# Altium PCB JammerCircuit_PCB.PcbDoc
Units mm, origin at the board's own origin, x right, y up, seen from the top; angles counter-clockwise.
Board outline 55 x 50 mm, 2 copper layers (Top Layer, Bottom Layer), stack 1.57 mm thick; 20 components, 12 nets, 52 pads, 0 vias.
Unrouted connection lines stored in the file: 11.
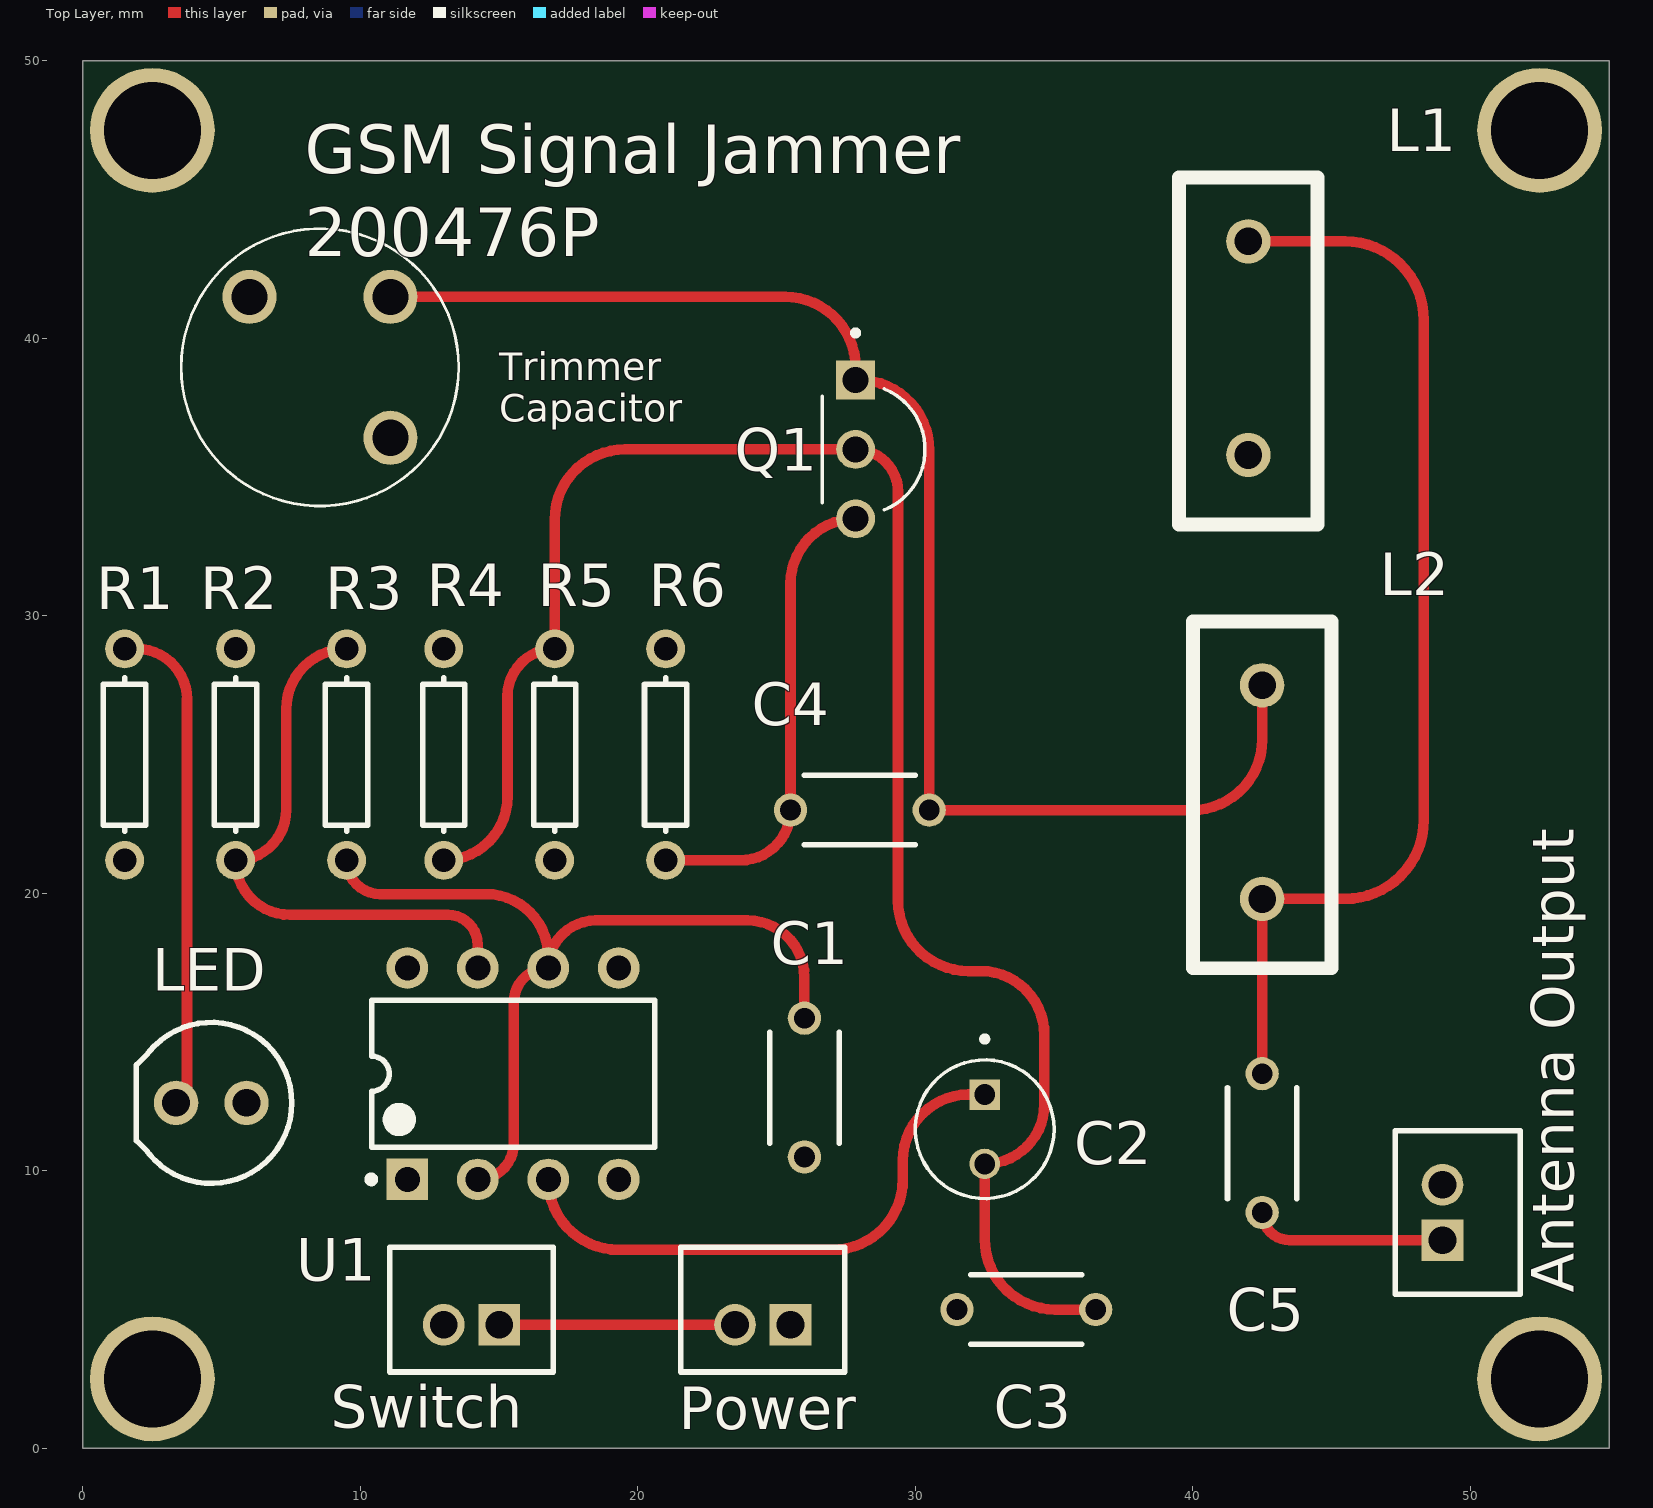
[diagram p0: Top Layer view]
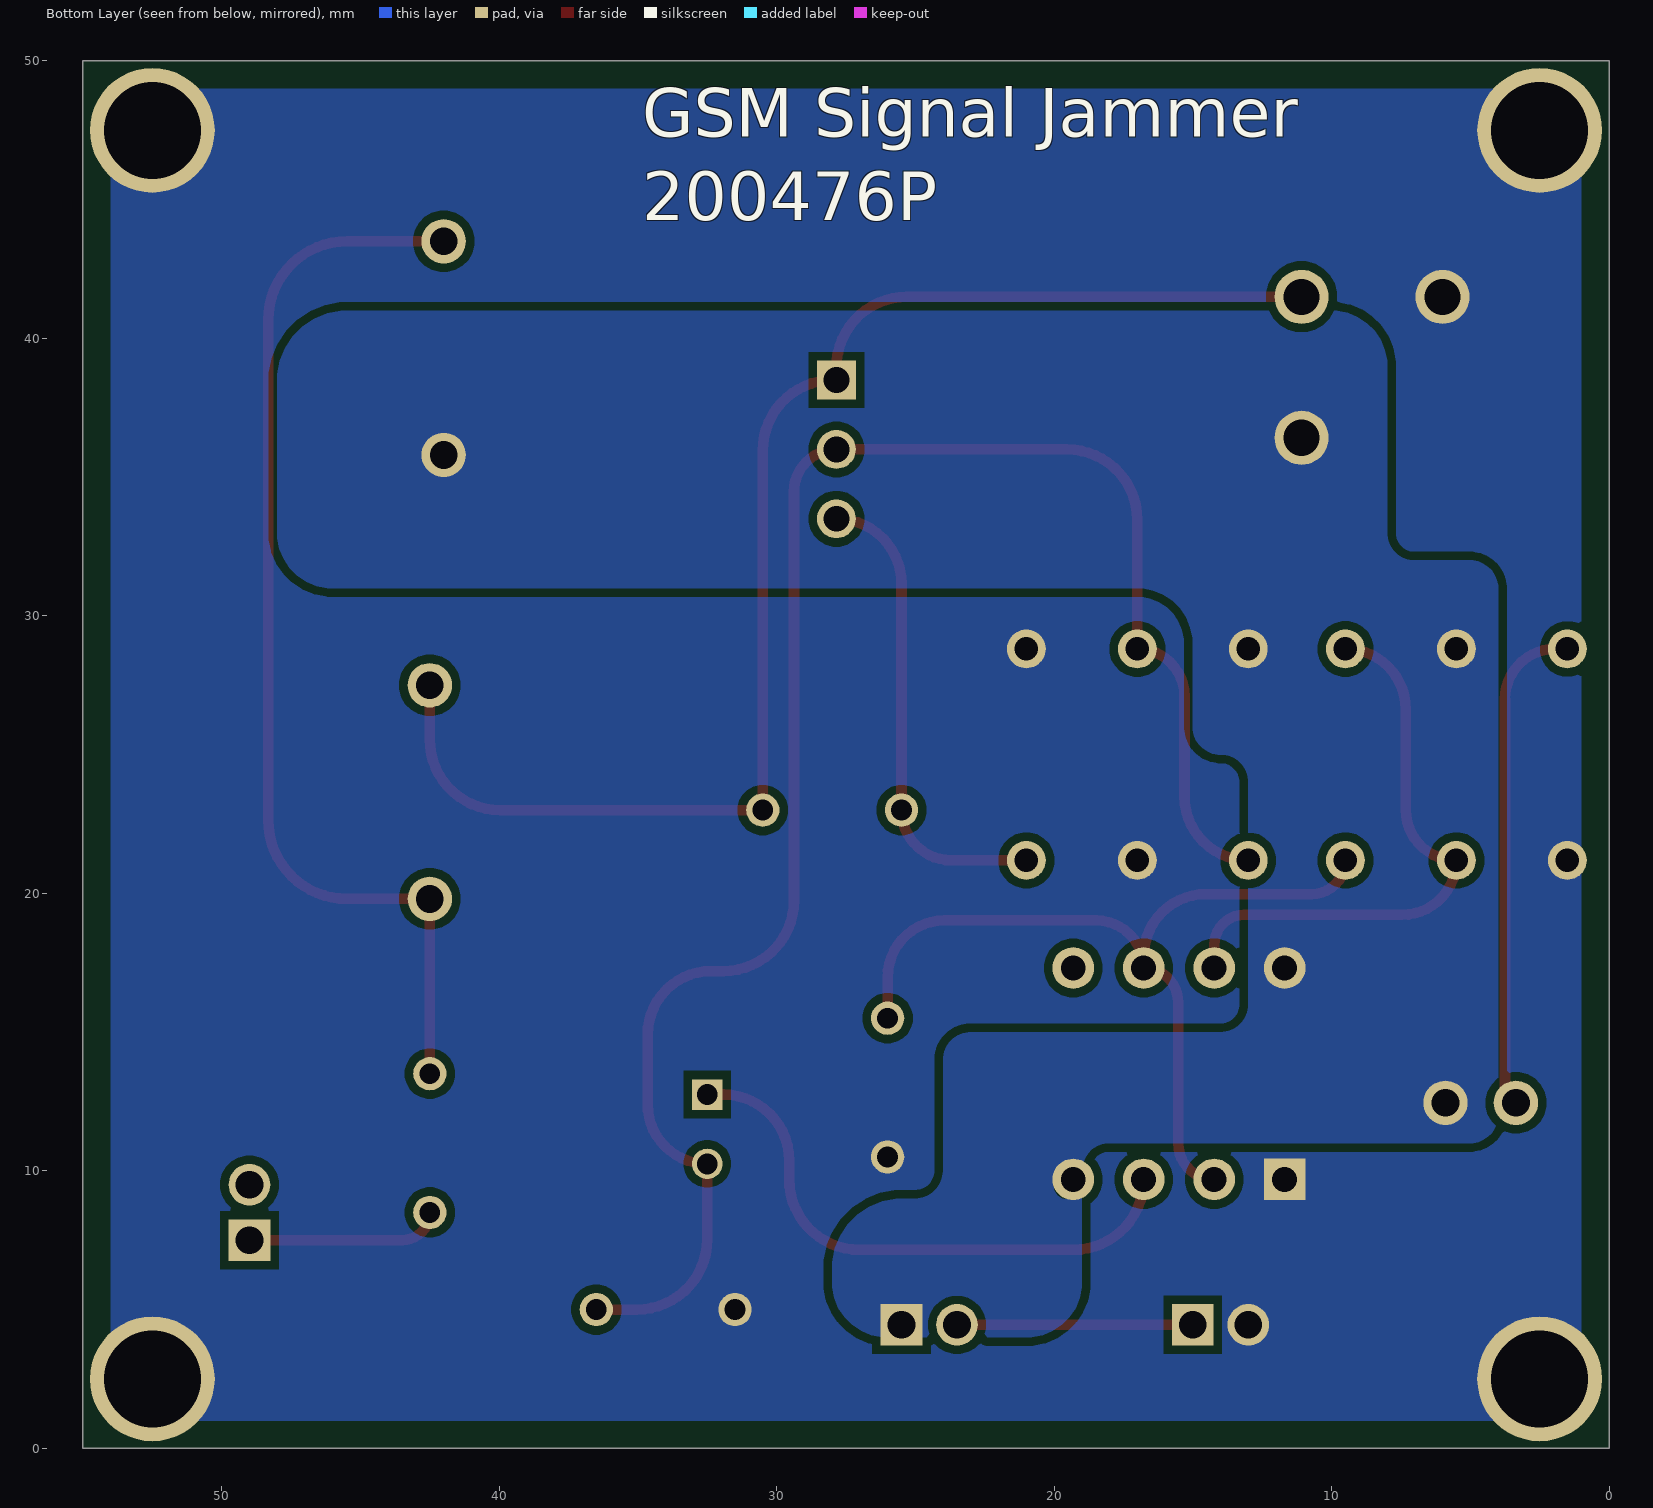
[diagram p1: Bottom Layer view, seen from below]

## Layer stack, top to bottom
Top Solder: solder mask 0.0127, Solder Resist, Dk 3.8
Top Layer: signal copper 0.035
Dielectric: core 1.5, FR-4, Dk 4.5
Bottom Layer: signal copper 0.035
Bottom Solder: solder mask 0.0127, Solder Resist, Dk 3.8

## Board outline
0,0 55,0 55,50 0,50

## Design rules (kind name [scope] priority, off if disabled: settings)
BoardOutlineClearance [All] p1: gap=0.2 ignorepadtopadclearanceinfootprint=FALSE
Clearance [All] p1: gap=0.3 ignorepadtopadclearanceinfootprint=FALSE
ComponentClearance [All] p1: gap=0.127 collisioncheckmode=3 verticalgap=0.127 showdistances=TRUE
DiffPairsRouting [All] p1: maxlimit=0.254 minlimit=0.127 mostfreqgap=0.127 toplayer_minwidth=0.127 toplayer_maxwidth=25.4 toplayer_prefwidth=0.127 bottomlayer_minwidth=0.127 bottomlayer_maxwidth=25.4 bottomlayer_prefwidth=0.127 maxuncoupledlength=12.7
Height [All] p1: minheight=0 maxheight=1816.048 prefheight=12.7
HoleSize [All] p1: absolutevalues=TRUE maxlimit=6.3 minlimit=0.3 maxpercent=80.000 minpercent=20.000
HoleToHoleClearance [All] p1: gap=0.25 allowstackedmicrovias=FALSE
MinimumAnnularRing [All] p1: minimumring=0.076
MinimumSolderMaskSliver [All] p1: minsoldermaskwidth=0
PlaneClearance [All] p1: clearance=0.5
PlaneConnect PlaneConnectPowerPads [InPadClass('PowerPads')] p1: planeconnectstyle=Direct reliefexpansion=0.508 reliefentries=4 reliefconductorwidth=0.254 reliefairgap=0.254
PlaneConnect [All] p2: planeconnectstyle=Direct reliefexpansion=0.3 reliefentries=4 reliefconductorwidth=0.127 reliefairgap=0.127
PolygonConnect PolygonConnectPowerPads [All vs (InPadClass('PowerPads'))] p1: connectstyle=Direct reliefconductorwidth=0.254 reliefentries=4 polygonreliefangle="90 Angle" airgapwidth=0.254
PolygonConnect [All] p2: connectstyle=Direct reliefconductorwidth=0.127 reliefentries=4 polygonreliefangle="90 Angle" airgapwidth=0.127
RoutingCorners [All] p1: cornerstyle=Round minsetback=2.54 maxsetback=2.54
RoutingVias [All] p1: holewidth=0.3 width=0.6 viastyle="Through Hole" minholewidth=0.3 minwidth=0.6 maxholewidth=0.6 maxwidth=6.6
SilkToSilkClearance [All] p1: silktosilkclearance=0
SilkToSolderMaskClearance [IsPad] p1: minsilkscreentomaskgap=0.127 clearancetoexposedcopper=TRUE
SolderMaskExpansion [All] p1: expansion=0.075 istentingtop=FALSE
Width [All] p1: maxlimit=25.4 minlimit=0.127 preferedwidth=0.35 minimp=50.000000 maximp=50.000000 favimp=50.000000
19 further rules are at their usual default settings.

## Classes and differential pairs
component class Sheet1: "Antenna Output" C1 C3 C4 C5 L1 L2 LED Power Q1 R1 R2 R3 R4 R5 R6 Switch U1

## Components (designator, comment, footprint, x,y, rotation, side; value= is the part's Value field where it differs from the comment)
"Antenna Output" "B2B-PH-K-S(LF)(SN)" JST-B2B-PH-K-S_V 49.55,8.5 r90 top
C1 "1pF" RDE5C1H330J0M1H03A 26,10.5 r90 top
C2 "4.7uF" CAPPRD250W50D500H1100 32.5,11.5 r270 top
C3 "50pF" RDE5C1H330J0M1H03A 31.5,5 r0 top
C4 "1pF" RDE5C1H330J0M1H03A 25.5,23 r0 top
C5 "5pF" RDE5C1H330J0M1H03A 42.5,13.5 r270 top
L1 "2.2" "Inductor Coil TH" 42,35.8 r90 top
L2 "1" "Inductor Coil TH" 42.5,19.8 r90 top
LED "151051BS04000" "Type 5mm" 4.625,12.45 r180 top
Power "B2B-PH-K-S(LF)(SN)" JST-B2B-PH-K-S_V 24.5,5 r180 top
Q1 "BC547B" TO92250P510H770-3 28.5,36 r270 top
R1 "Res1" AXIAL-0.3 1.5,25 r90 top value=220
R2 "Res2" AXIAL-0.3 5.5,25 r90 top value=6.8K
R3 "Res3" AXIAL-0.3 9.5,25 r270 top value=82K
R4 "Res4" AXIAL-0.3 13,25 r90 top value=10K
R5 "Res5" AXIAL-0.3 17,25 r90 top value=6K
R6 "Res6" AXIAL-0.3 21,25 r270 top value=220
Switch "B2B-PH-K-S(LF)(SN)" JST-B2B-PH-K-S_V 14,5 r180 top
"Trimmer Capacitor" "BFC280811339" BFC280811339 11.08,36.42 r180 top
U1 "NE555P" P0008A 15.5,13.5 r90 top

## Footprints (in the part's own frame and the unit in brackets; to place one, negate y for a bottom-side part, rotate by r counter-clockwise, add the part's x,y. Pads: shape width x height; smd on the part's side, far side on the other; paste and mask are expansions set on the pad)
AXIAL-0.3 [mm] "Axial Device, Thru-Hole; 2 Leads; 0.3 in Pin Spacing"
  round 1.4 hole 0.85: 1(-3.81,0) 2(3.81,0)
  silkscreen extent -2.77,-0.76 2.77,0.76
BFC280811339 [mm]
  round 1.95 hole 1.3: 1(0,0) 2(0,-5.08) 3(5.08,-5.08)
  silkscreen extent -2.46,-7.54 7.54,2.46, body extent -10,-3.38 10,3.38, height 5.8
CAPPRD250W50D500H1100 [mm]
  round 1.1 hole 0.75: N(1.25,0)
  rect 1.1x1.1 hole 0.75: P(-1.25,0)
  silkscreen extent -3.35,-2.5 2.5,2.5, body extent -2.5,-2.5 2.5,2.5, height 11
"Inductor Coil TH" [mm]
  round 1.6 hole 1: 0(7.7,0) 1(0,0)
  silkscreen extent -2.5,-2.5 10,2.5, body extent -2.26,-8.91 9.81,8.87, height 17.79
JST-B2B-PH-K-S_V [mm] "Connector, 2-Leads, Body 5.9x4.5mm, Pitch 2mm"
  rect 1.5x1.5 hole 1: 1(-1,0.55)
  round 1.5 hole 1: 2(1,0.55)
  silkscreen extent -2.95,-2.25 2.95,2.25, body extent -2.95,-2.25 2.95,2.25, height 6
P0008A [mm] "DIP, 8-Leads, Body 10.15x6.6mm, Pitch 2.54mm"
  rect 1.5x1.5 hole 0.9: 1(-3.81,3.81)
  round 1.5 hole 0.9: 2(-3.81,1.27) 3(-3.81,-1.27) 4(-3.81,-3.81) 5(3.81,-3.81) 6(3.81,-1.27) 7(3.81,1.27) 8(3.81,3.81)
  silkscreen extent -3.93,-5.1 2.65,5.23, body extent -3.95,-5.07 3.95,5.07, height 5.08
RDE5C1H330J0M1H03A [mm]
  round 1.2 hole 0.75: 1(0,0) 2(5,0)
  silkscreen extent 0.5,-1.25 4.5,1.25, body extent -0.29,-1.25 5.21,1.25, height 6
TO92250P510H770-3 [mm]
  rect 1.4x1.4 / inner round 1.4 / far side rect 1.4x1.4 hole 0.93: 1(-2.5,-0.655)
  round 1.4 hole 0.93: 2(0,-0.655) 3(2.5,-0.655)
  silkscreen extent -4.3,-1.85 2.18,1.85, body extent -2.38,-1.43 2.38,2.19, height 5.33
"Type 5mm" [mm] "THT, LED-5mm, 2pin- Body 5.8mm"
  round 1.6 hole 1: 1(1.27,0) 2(-1.27,0)
  silkscreen extent -2.9,-2.9 2.7,2.9, body extent -2.9,-2.9 2.5,2.9, height 11.7

## Part data
"Antenna Output" Power Switch: library part CMP-2000-05162-1, "Male Header, Pitch 2 mm, 1 x 2 Position, Height 6 mm, Tail Length 3.4 mm, -25 to 85 degC, RoHS, Bulk", Manufacturer=JST, Datasheet URL=http://datasheet.octopart.com/B2B-PH-K-S%28LF%29%28SN%29-JST-datasheet-8324864.pdf, Datasheet Version=Nov-08, Manufacturer URL=http://www.jst.com/home2.html, No of Positions=2, Pitch=2mm, Style/Orientation=StraightHeader/Plug, Termination=Crimp, Type=ShroudedHeader
C1 C3 C4: library part RDE5C1H1R0C0M1H03A, "Capacitor L=4.0mm W=3.5mm T=2.5mm", Manufacturer_Name="Murata Electronics", Mouser Part Number=81-RDE5C1H1R0C0M1H3A, Datasheet Link=https://componentsearchengine.com/Datasheets/1/RDE5C1H1R0C0M1H03A.pdf, Geometry.Height=5mm, Manufacturer_Part_Number=RDE5C1H1R0C0M1H03A, Mouser Price/Stock=https://www.mouser.com/Search/Refine.aspx?Keyword=81-RDE5C1H1R0C0M1H3A
C2: library part EEUEB1J100SH, "10ÂµF 63V Aluminum Electrolytic Capacitors Radial, Can 5000 Hrs @ 105Â°C", Package="RADIAL-2 Panasonic", Availability="In Stock", Check_prices=https://www.snapeda.com/parts/EEUEB1J100SH/Panasonic/view-part/5796687/?ref=eda, MF=Panasonic, MP=EEUEB1J100SH, Price=None, SnapEDA_Link=https://www.snapeda.com/parts/EEUEB1J100SH/Panasonic/view-part/5796687/?ref=snap
C5: library part RDE5C1H5R0C0K1H03B, "Capacitor L=4.0mm W=3.5mm T=2.5mm", Manufacturer_Name="Murata Electronics", Mouser Part Number=81-RDE5C1H5R0C0K1H3B, Datasheet Link=https://componentsearchengine.com/Datasheets/1/RDE5C1H5R0C0K1H03B.pdf, Geometry.Height=5mm, Manufacturer_Part_Number=RDE5C1H5R0C0K1H03B, Mouser Price/Stock=https://www.mouser.com/Search/Refine.aspx?Keyword=81-RDE5C1H5R0C0K1H3B
L1 L2: library part Inductor
LED: library part CMP-1488-00009-1, "THT LED round mono-color color lens, WL-TMRW, Blue", Emitting color=Blue, Manufacturer="Wuerth Elektronik", ComponentLink1Description="Manufacturer URL", ComponentLink1URL=http://www.we-online.com, ComponentLink2Description=Datasheet, ComponentLink2URL=http://katalog.we-online.de/pbs/datasheet/7448042001.pdfhttp://katalog.we-online.de/pbs/datasheet/7448042001.pdfhttp://katalog.we-online.de/pbs/datasheet/7448042001.pdfhttp://katalog.we-online.de/pbs/datasheet/151051BS04000.pdf, PackageReference="Type 5mm", PartNumber=151051BS04000
Q1: "Bipolar (BJT) TransistÃ¶r NPN 45 V 100 mA 300MHz 625 mW Delikten TO-92 (TO-226)", Package="TO-92-3 ON Semiconductor", Availability="In Stock", Check_prices=https://www.snapeda.com/parts/BC547B/Onsemi/view-part/?ref=eda, MF="ON Semiconductor", MP=BC547B, Price=None, Purchase-URL=https://pricing.snapeda.com/search/part/BC547B/?ref=eda, SnapEDA_Link=https://www.snapeda.com/parts/BC547B/Onsemi/view-part/?ref=snap
R1: "Resistor", LatestRevisionDate=17-Jul-2002, LatestRevisionNote="Re-released for DXP Platform.", PackageDescription="Axial Device, Thru-Hole; 2 Leads; 0.3 in Pin Spacing", PackageReference=AXIAL-0.3, Published=8-Jun-2000, Publisher="Altium Limited"
R2 R3 R4 R5 R6: library part Res1, "Resistor", LatestRevisionDate=17-Jul-2002, LatestRevisionNote="Re-released for DXP Platform.", PackageDescription="Axial Device, Thru-Hole; 2 Leads; 0.3 in Pin Spacing", PackageReference=AXIAL-0.3, Published=8-Jun-2000, Publisher="Altium Limited"
"Trimmer Capacitor": "CAP TRIMMER 3-33PF 250V TH", Manufacturer_Name=Vishay, Arrow Part Number=BFC280811339, Arrow Price/Stock=https://www.arrow.com/en/products/bfc280811339/vishay, Datasheet Link=https://www.arrow.com/en/products/bfc280811339/vishay, Geometry.Height=10mm, Manufacturer_Part_Number=BFC280811339
U1: library part CMP-2000-04954-1, "Precision Timer, 4.5 to 16 V, 0 to 70 degC, 8-Pin DIP, Pb-Free, Tube", Manufacturer=TexasInstruments, Maximum High Level Output Current=-200mA, Maximum Low Level Output Current=200mA, Operating Supply Voltage=5, Package=8PDIP, Package Description="8-Pin Double In-line Package, Body 9.59 x 6.35 mm, Pitch 2.54 mm", Package Reference=P8, Category=Timer, Datasheet URL=http://www.ti.com/general/docs/lit/getliterature.tsp?genericPartNumber=NE555&fileType=pdf, Datasheet Version="Rev. I, 09/2014", Manufacturer URL=http://www.ti.com/, Number of Internal Timers=1, Package URL=http://www.ti.com/lit/ml/mpdi001b/mpdi001b.pdf, Packaging=Rail/Tube, Rad Hard=No, Type=Standard

## Free pads (board coordinates)
  round 4.5 hole 3.5: 13(2.5,2.5) 13(2.5,47.5) 13(52.5,2.5) 13(52.5,47.5)

## Nets (pads, with @x,y where several pads share a name; then routed paths per layer and width w, separated by ;. In a path a pad name is that pad's centre, name@x,y a point inside that pad or via, vN(x,y) a via of type N, cw(c..) or ccw(c..) an arc to the next point about the centre after c; other vN are vias at no path point)
GND: "Trimmer Capacitor.3" C1.1 C3.1 R1.1 R5.1 R6.1 Switch.2 U1.1
"NetAntenna Output_1": "Antenna Output.1" C5.2 | length 7.1
  Top Layer w0.381: C5.2 ccw(c43.5,8.5) 43.5,7.5 49,7.5
NetC1_2: C1.2 R3.2 U1.2 U1.6 | length 31.6
  Top Layer w0.381: R3.2 ccw(c10.715,21.19) 10.715,19.975 14.525,19.975 cw(c14.525,17.73) 16.77,17.73 U1.6 ; U1.2 ccw(c14.23,10.985) 15.525,10.985 15.525,16.065 cw(c16.77,16.065) U1.6 ; C1.2 26,16.975 ccw(c23.95,16.975) 23.95,19.025 18.485,19.025 ccw(c18.485,17.31) U1.6
NetC2_N: C2.N C3.2 Q1.2 R4.1 R5.2 | length 66.1
  Top Layer w0.381: R4.1 ccw(c13,23.49) 15.3,23.49 15.3,27.11 cw(c17,27.11) R5.2 17,33.46 cw(c19.54,33.46) 19.54,36 Q1.2 cw(c27.845,34.47) 29.375,34.47 29.375,19.74 ccw(c31.915,19.74) 31.915,17.2 32.35,17.2 cw(c32.35,14.9) 34.65,14.9 34.65,12.4 cw(c32.5,12.4) C2.N 32.5,7.54 ccw(c35.04,7.54) 35.04,5 C3.2
NetC2_P: C2.P U1.3 | length 20.7
  Top Layer w0.381: U1.3 ccw(c19.31,9.69) 19.31,7.15 27.01,7.15 ccw(c27.01,9.69) 29.55,9.69 29.55,10.375 cw(c31.925,10.375) 31.925,12.75 C2.P
NetC4_1: C4.1 Q1.3 R6.2 | length 17.4
  Top Layer w0.381: R6.2 23.69,21.19 ccw(c23.69,23) C4.1 25.5,31.155 cw(c27.845,31.155) Q1.3
NetC4_2: "Trimmer Capacitor.2" C4.2 L2.0 Q1.1 | length 51.1
  Top Layer w0.381: 11.08,41.5 25.305,41.5 cw(c25.305,38.96) 27.845,38.96 Q1.1 27.96,38.5 cw(c27.96,35.96) 30.5,35.96 C4.2 39.96,23 ccw(c39.96,25.54) 42.5,25.54 L2.0
NetC5_1: C5.1 L1.0 L2.1 | length 39.7
  Top Layer w0.381: L1.0 45.485,43.5 cw(c45.485,40.66) 48.325,40.66 48.325,22.64 cw(c45.485,22.64) 45.485,19.8 L2.1 C5.1
NetLED_1: LED.1 R1.2 | length 18.1
  Top Layer w0.381: R1.2 1.94,28.81 cw(c1.94,27) 3.75,27 3.75,12.845 cw(c3.355,12.845) LED.1
NetPower_2: Power.2 Switch.1 | length 8.5
  Top Layer w0.381: Switch.1 Power.2
NetR2_1: R2.1 R3.1 U1.7 | length 21.2
  Top Layer w0.381: R3.1 ccw(c9.5,26.635) 7.325,26.635 7.325,23.015 cw(c5.5,23.015) R2.1 ccw(c7.465,21.19) 7.465,19.225 13.15,19.225 cw(c13.15,18.145) 14.23,18.145 U1.7
Power: "Trimmer Capacitor.1" L1.1 LED.2 Power.1 R2.2 R4.2 U1.4 U1.8 | length 0.3
  Bottom Layer w0.381: U1.4 U1.4@19.524,9.476
pads on no net: "Antenna Output.2" U1.5

## Polygon pours and split planes (outlines as drawn)
GND on Bottom Layer "GND_L02_P004" (solid, remove dead copper, pour order 4): 52,49 cw(c52,47) 54,47 54,3.54 cw(c51.46,3.54) 51.46,1 3,1 cw(c3,3) 1,3 1,47 cw(c3,47) 3,49 5,49
Power on Bottom Layer "POWER_L02_P001" (solid, remove dead copper, pour order 1): 26,4 ccw(c26,6) 28,6 28,6.46 ccw(c25.46,6.46) 25.46,9 25,9 cw(c25,10) 24,10 24,14 ccw(c23,14) 23,15 14,15 cw(c14,16) 13,16 13,24 cw(c14,24) 14,25 ccw(c14,26) 15,26 15,29 cw(c17,29) 17,31 46,31 ccw(c46,33) 48,33 48,38.46 ccw(c45.46,38.46) 45.46,41 10,41 ccw(c10,39) 8,39 8,33 cw(c7,33) 7,32 5,32 ccw(c5,31) 4,31 4,12 ccw(c5,12) 5,11 18,11 cw(c18,10) 19,10 19,6 ccw(c21,6) 21,4

## Silkscreen, mask and mechanical layers (free items; w line width, h text height)
Top Overlay:
  text "GSM Signal Jammer / 200476P" at 8,42.385 h3
  text "Trimmer / Capacitor" at 15,37 h1
Bottom Overlay:
  text "GSM Signal Jammer / 200476P" at 34.843,43.688 h3
Mechanical 13:
  the board outline again, w0.5